# Altium PCB 全场定位.PcbDoc
Units mil, origin at the board's own origin, x right, y up, seen from the top; angles counter-clockwise.
Board outline 2750.25 x 1650.38 mil, 2 copper layers (Top Layer, Bottom Layer); 83 components, 62 nets, 319 pads, 70 vias.
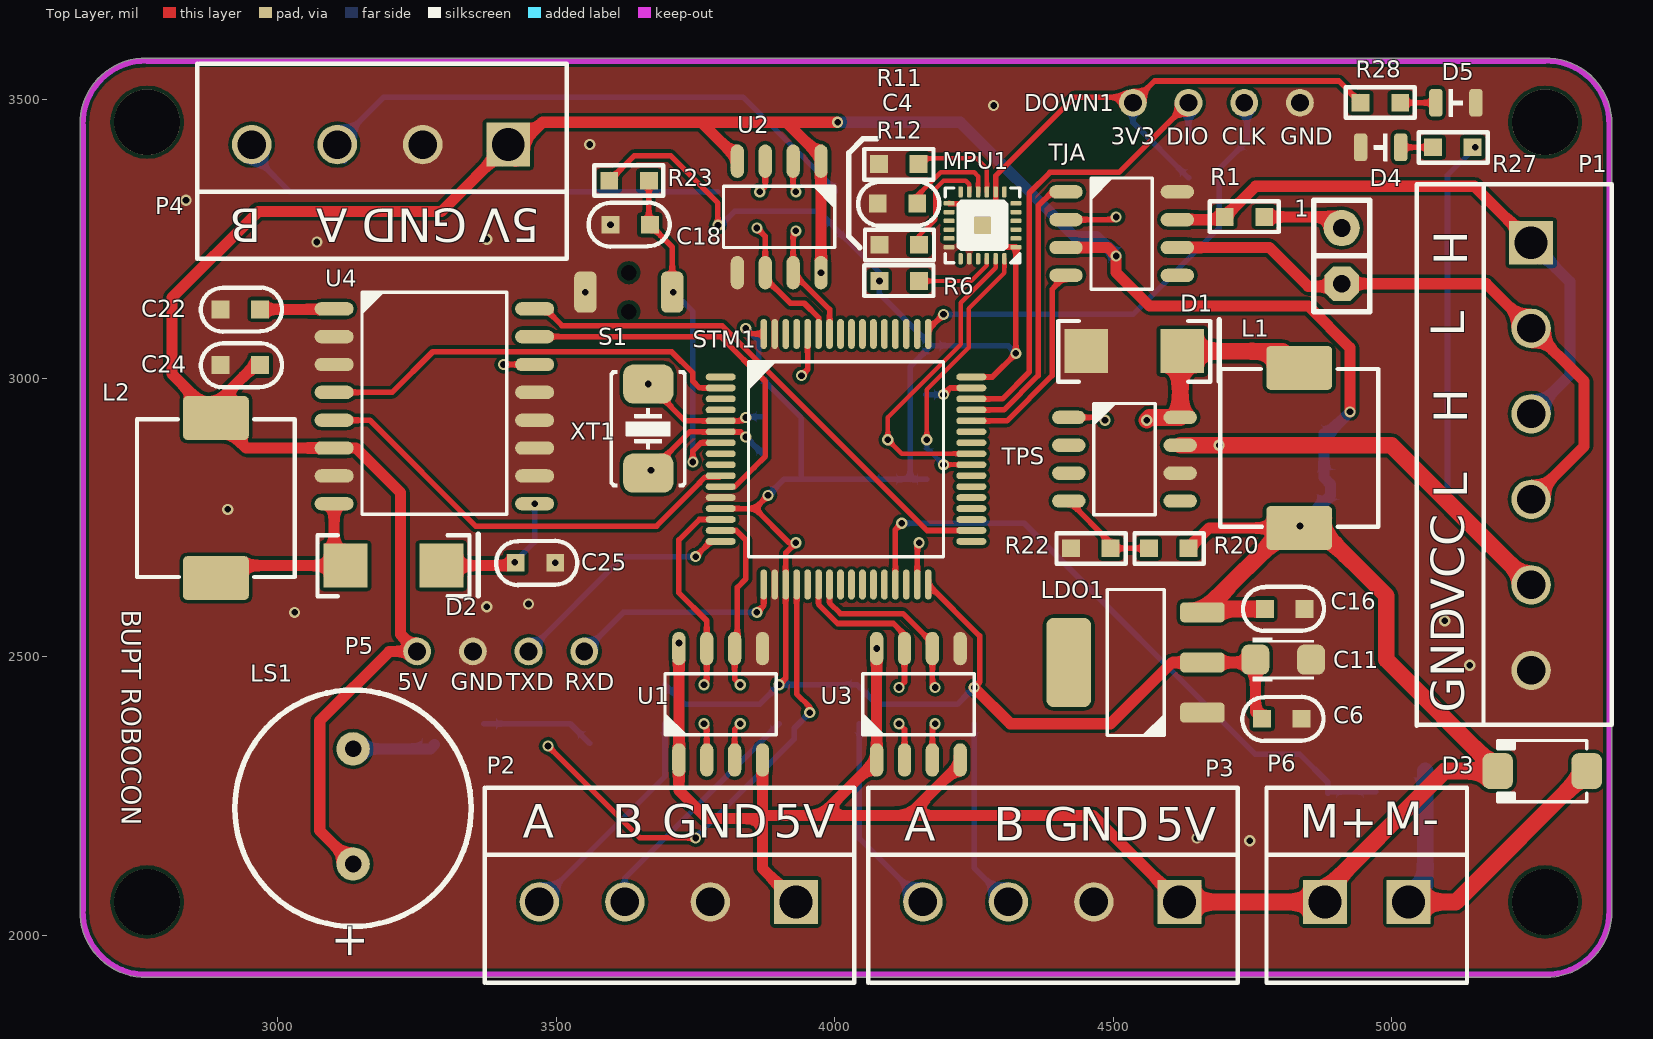
[diagram p0: Top Layer view]
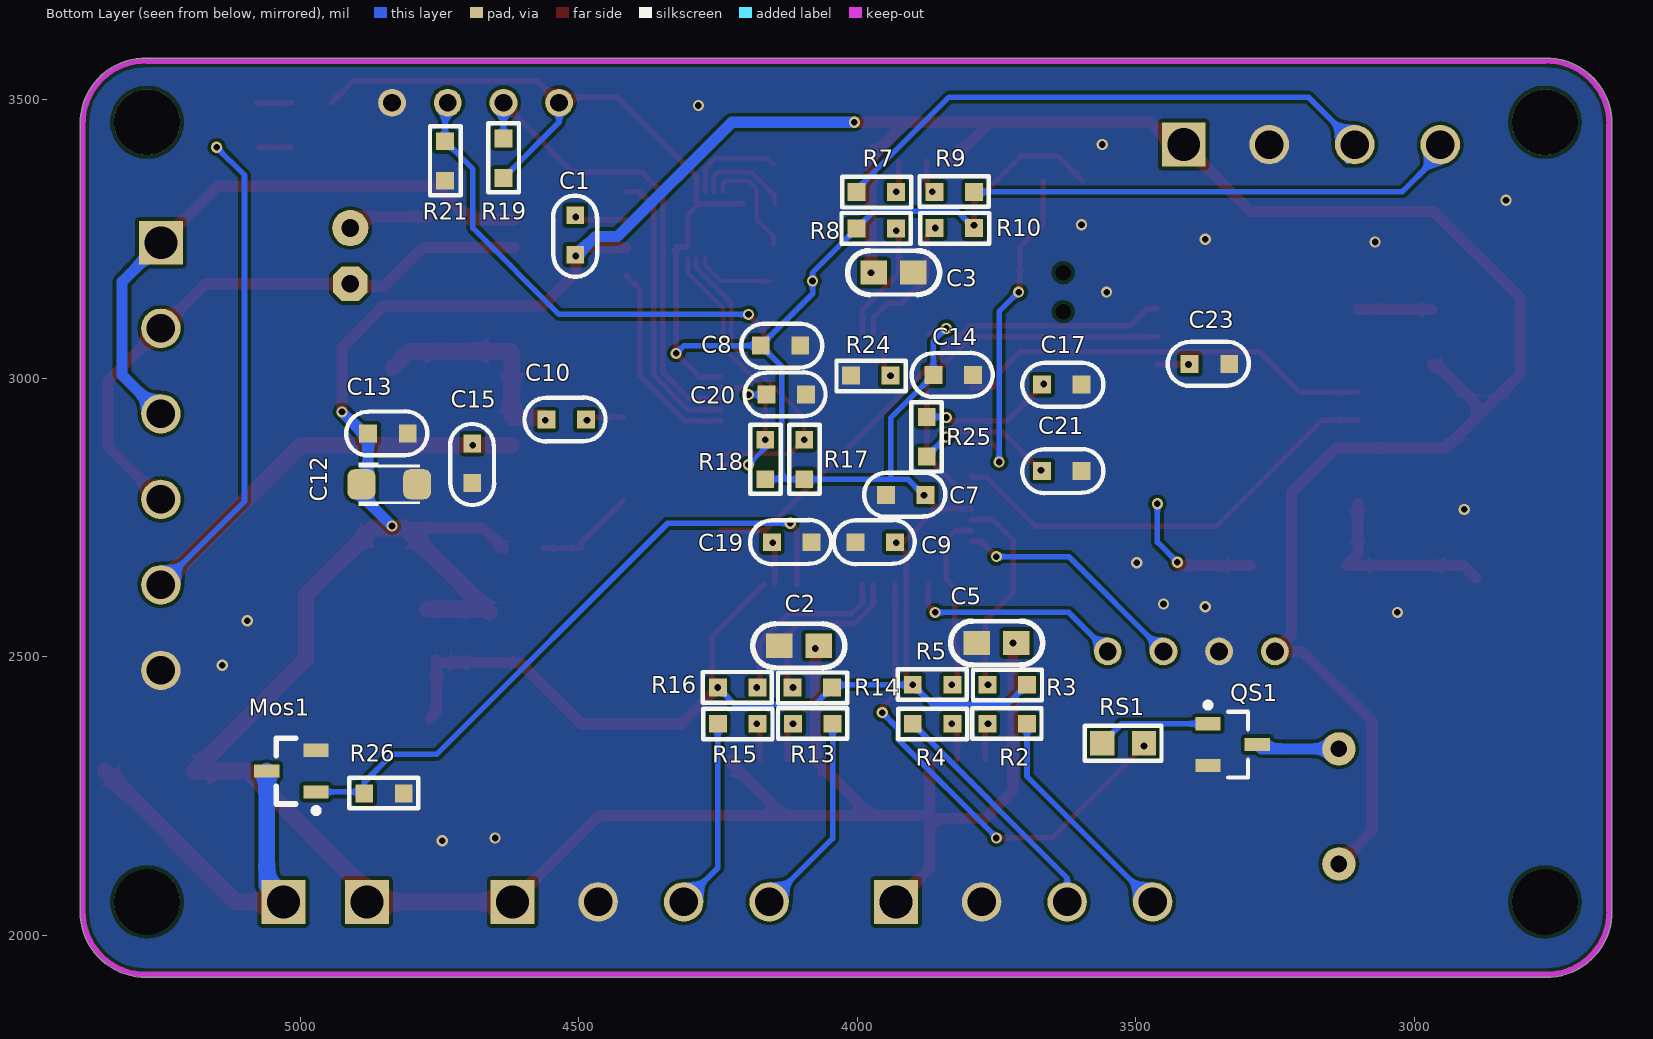
[diagram p1: Bottom Layer view, seen from below]
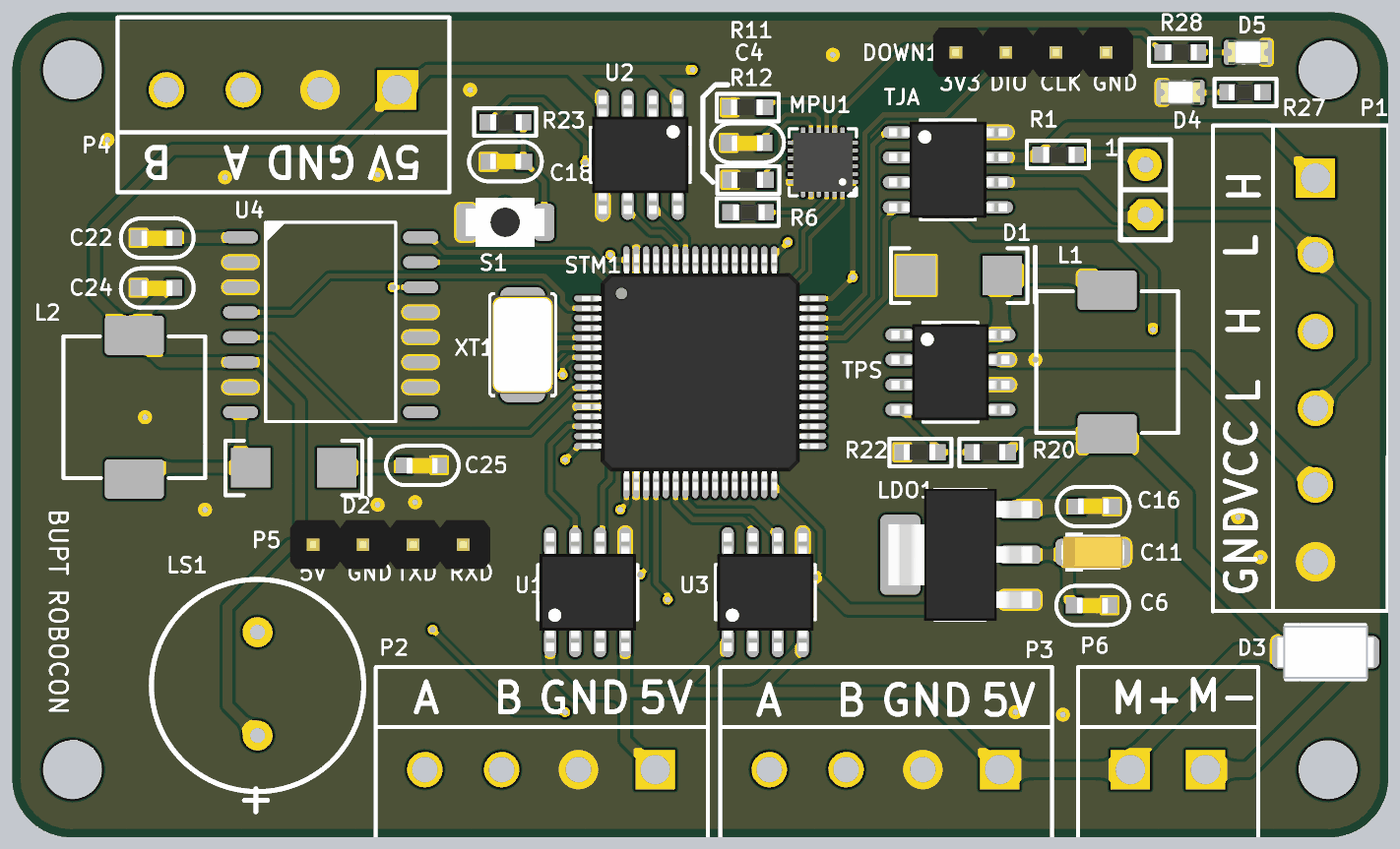
[diagram p2: 3D render of the assembled board from above, using the file's embedded part models]
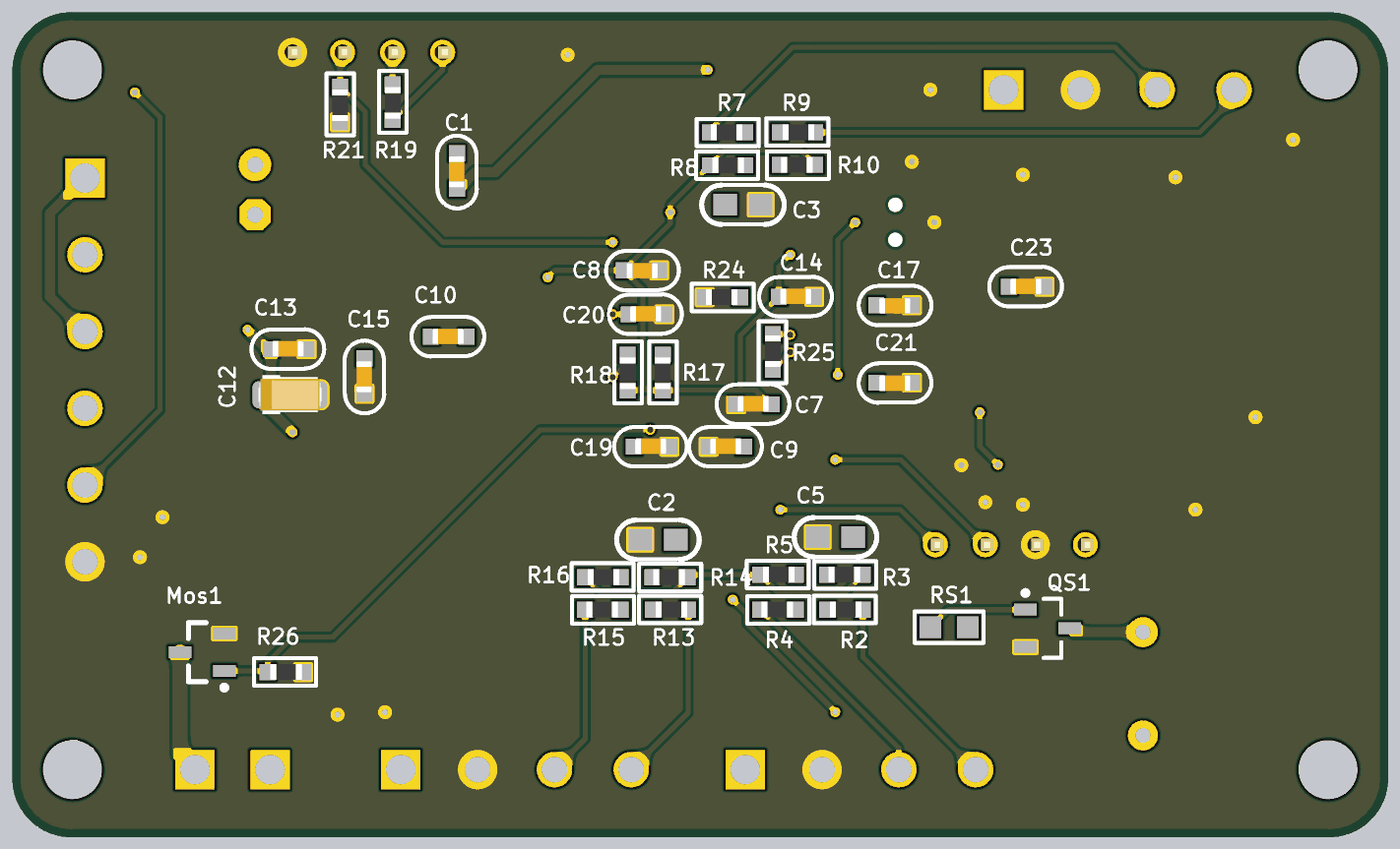
[diagram p3: 3D render of the assembled board from below, using the file's embedded part models]

## Layer stack, top to bottom
Top Solder: solder mask 0.4, Solder Resist, Dk 3.5
Top Layer: signal copper 1.4
Dielectric 1: dielectric 12.6, FR-4, Dk 4.8
Bottom Layer: signal copper 1.4
Bottom Solder: solder mask 0.4, Solder Resist, Dk 3.5

## Board outline
2644.92,2044.95 ccw(c2762.41,2042.34) 2765.15,1924.86 ccw(c2765.03,1929.87) 2766.17,1924.98 5273.41,1924.98 ccw(c5274.88,1929.78) 5274.76,1924.77 5274.85,1924.77 ccw(c5274.97,1929.78) 5275.82,1924.84 ccw(c5277.59,2042.34) 5395.11,2042.34 ccw(c5277.59,2042.34) 5395.08,2044.95 ccw(c5390.06,2044.84) 5395.02,2045.63 5395.02,3454.37 ccw(c5390.06,3455.16) 5395.08,3455.05 ccw(c5277.59,3457.66) 5395.11,3457.66 ccw(c5277.59,3457.66) 5274.85,3575.14 ccw(c5274.97,3570.13) 5273.83,3575.01 2765.63,3575.01 ccw(c2764.84,3570.06) 2764.95,3575.08 ccw(c2762.34,3457.59) 2644.86,3454.85 ccw(c2649.87,3454.97) 2644.99,3453.83 2644.99,2045.63 ccw(c2649.94,2044.84)

## Design rules (kind name [scope] priority, off if disabled: settings)
Clearance [All] p1: gap=6 ignorepadtopadclearanceinfootprint=FALSE
PolygonConnect [All] p1: connectstyle=Direct reliefconductorwidth=10 reliefentries=4 polygonreliefangle="90 Angle" airgapwidth=10
RoutingVias [All] p1: holewidth=28 width=50 viastyle="Through Hole" minholewidth=28 minwidth=50 maxholewidth=28 maxwidth=50
SolderMaskExpansion [All] p1: expansion=4
Width [All] p1: maxlimit=50 minlimit=5 preferedwidth=10 minimp=50.000000 maximp=50.000000 favimp=50.000000
30 further rules are at their usual default settings.

## Components (designator, comment, footprint, x,y, rotation, side; value= is the part's Value field where it differs from the comment)
1 "Header 2" SIP2 4910,3270 r270 top
C1 "Cap_0603" CAP_0603 4505,3255 r90 bottom value=0.1u
C2 "Cap" CAP-MLCC-0603 4069.13,2520 r180 bottom value=0.1uF
C3 "Cap" CAP-MLCC-0603 3970,3190 r0 bottom value=0.1uF
C4 "Cap_0603" CAP_0603 4115,3315 r180 top value=0.1u
C5 "Cap" CAP-MLCC-0603 3714.13,2525 r180 bottom value=0.1uF
C6 "Cap_0603" CAP_0603 4805,2390 r180 top value=0.1u
C7 "Cap_0603" CAP_0603 3915,2790 r180 bottom value=0.1u
C8 "Cap_0603" CAP_0603 4135,3060 r0 bottom value=0.1u
C9 "Cap_0603" CAP_0603 3970,2705 r180 bottom value=0.1u
C10 "Cap_0603" CAP_0603 4525,2925 r180 bottom value=0.1u
C11 "Cap_Tan_1206" CAP_TAN_A1206 4805,2495 r0 top value=?F
C12 "Cap_Tan_1206" CAP_TAN_A1206 4840,2810 r180 bottom value=?F
C13 "Cap_0603" CAP_0603 4845,2900 r180 bottom value=0.1u
C14 "Cap_0603" CAP_0603 3830,3005 r180 bottom value=0.1u
C15 "Cap_0603" CAP_0603 4690,2845 r90 bottom value=1u
C16 "Cap_0603" CAP_0603 4805,2585 r0 top value=0.1u
C17 "Cap_0603" CAP_0603 3630,2990 r0 bottom value=20pf
C18 "Cap_0603" CAP_0603 3630,3275 r0 top value=0.1u
C19 "Cap_0603" CAP_0603 4120,2705 r180 bottom value=0.1u
C20 "Cap_0603" CAP_0603 4130,2970 r180 bottom value=0.1u
C21 "Cap_0603" CAP_0603 3630,2835 r0 bottom value=20pf
C22 "Cap_0603" CAP_0603 2935,3125 r180 top value=1u
C23 "Cap_0603" CAP_0603 3370,3025 r180 bottom value=1u
C24 "Cap_0603" CAP_0603 2935,3025 r180 top value=1u
C25 "Cap_0603" CAP_0603 3465,2670 r180 top value=0.1u
D1 "Diode" SS34 4535,3045 r180 top
D2 "Diode" SS34 3205,2660 r180 top
D3 "Diode_SMA" DO-214AC 5270,2295 r180 top value=1N?
D4 "LED_0805" LED_0805_YELLOW 4980,3415 r180 top
D5 "LED_0805" LED_0805_YELLOW 5115,3495 r0 top
DOWN1 "HDR1x4_2.54" HDR1X4_2.54_180 4535,3495 r90 top
L1 "Inductor" CD74 4830,2870 r180 top value=47uH
L2 "Inductor" CD74 2885,2780 r180 top value=560uH
LDO1 "LDO1117" SOT223-3 4540,2490 r90 top
LS1 "Bell" Ring 3135,2228.31 r90 top
Mos1 "MOSFET N" Nmos_SOT23 5015.71,2295 r0 bottom
MPU1 "MPU9250" QFN_P0.4_24 4265,3275 r180 top
P1 "HDR1x6_2.54" green_6p 5345,3168.54 r270 top
P2 "HDR1x4_2.54" Green_4P 3855,1965 r180 top
P3 "HDR1x4_2.54" green_4p#1 4543.54,1965 r180 top
P4 "HDR1x4_2.54" green_4p#2 3338.54,3515 r180 top
P5 "HDR1x4_2.54" HDR1X4_2.54_180 3250,2510 r90 top
P6 "Connector" "Green 2P" 4960.78,2058.99 r180 top
QS1 "8050" SOT-23B_N 3325.71,2342.6 r180 bottom
R1 "Res_0603" RES_0603 4737,3372 r0 top value=120
R2 "Res_0603" RES_0603 3729,2462 r180 bottom value=10K
R3 "Res_0603" RES_0603 3732,2368 r0 bottom value=10K
R4 "Res_0603" RES_0603 3866,2298 r0 bottom value=10K
R5 "Res_0603" RES_0603 3863,2532 r180 bottom value=10K
R6 "Res_0603" RES_0603 4117,3257 r0 top value=10K
R7 "Res_0603" RES_0603 3967,3253 r0 bottom value=10K
R8 "Res_0603" RES_0603 3964,3351 r180 bottom value=10K
R9 "Res_0603" RES_0603 3824,3417 r180 bottom value=10K
R10 "Res_0603" RES_0603 3827,3188 r0 bottom value=10K
R11 "Res_0603" RES_0603 4113,3303 r180 top value=10K
R12 "Res_0603" RES_0603 4114,3158 r180 top value=10K
R13 "Res_0603" RES_0603 4078,2462 r180 bottom value=10K
R14 "Res_0603" RES_0603 4082,2363 r0 bottom value=10K
R15 "Res_0603" RES_0603 4216,2298 r0 bottom value=10K
R16 "Res_0603" RES_0603 4213,2527 r180 bottom value=10K
R17 "Res_0603" RES_0603 4013,2853 r270 bottom value=10K
R18 "Res_0603" RES_0603 4083,2853 r270 bottom value=10K
R19 "Res_0603" RES_0603 4553,3394 r270 bottom value=10K
R20 "Res_0603" RES_0603 4598,2613 r180 top value=10K
R21 "Res_0603" RES_0603 4658,3389 r270 bottom value=10K
R22 "Res_0603" RES_0603 4458,2613 r180 top value=3.3K
R23 "Res_0603" RES_0603 3632,3437 r0 top value=10K
R24 "Res_0603" RES_0603 3977,2923 r0 bottom value=10K
R25 "Res_0603" RES_0603 3957,2897 r90 bottom value=1M
R26 "Res_0603" RES_0603 4848,2337 r180 bottom value=10K
R27 "Res_0603" RES_0603 5108,3333 r180 top value=1K
R28 "Res_0603" RES_0603 4981,3577 r0 top value=1K
RS1 "Res1" RES-0603 3559.8,2345 r0 bottom value=1K
S1 "ButtonTACT_3x4x2_180" ButtonTACT_3x4x2_180H 3630,3155 r180 top
STM1 "STM32F4" LQFP_P0.5_64 4020,2855 r0 top
TJA "TJA1050" SOP_E150_8 4515,3260 r0 top
TPS "TPS5430" SOP_E150_8 4520,2855 r0 top (schematic designator *1)
U1 "HCPL0630" SOP_E150_8 3795,2415 r90 top
U2 "HCPL0630" SOP_E150_8 3900,3290 r270 top
U3 "HCPL0630" SOP_E150_8 4150,2415 r90 top
U4 "ADXRS810" sop16 3295,2945 r0 top
XT1 "XTAL_5032_2P" XT_5032_2 3665,2910 r90 top value=8M

## Footprints (in the part's own frame and the unit in brackets; to place one, negate y for a bottom-side part, rotate by r counter-clockwise, add the part's x,y. Pads: shape width x height; smd on the part's side, far side on the other; paste and mask are expansions set on the pad)
ButtonTACT_3x4x2_180H [mil]
  round 0 hole 28: 0(0,35) 0(0,-35)
  rrect50% 40x74 smd: 1(-78,0) 2(78,0)
  body extent -79,-49 79,49, height 63
CAP-MLCC-0603 [mm]
  rect 1.2x1.1 smd: 1(0,0) 2(-1.8,0)
  silkscreen extent -3,-1 1.2,1, body extent -1.77,-0.47 -0.02,0.48, height 0.85
CAP_0603 [mil]
  rect 32x32 smd: 1(-33,1) 2(38,1)
  silkscreen extent -72,-38 73,41, body extent -30,-14 33,18, height 31
CAP_TAN_A1206 [mil]
  rrect50% 50x54 smd: 1(-50,0) 2(50,0)
  silkscreen extent -55,-39 55,39, body extent -63,-31 63,32, height 71
CD74 [mm]
  rrect20% 3x2 smd: 1(-0.095,-3.784) 2(-0.095,3.516)
  silkscreen extent -3.69,-3.73 3.51,3.47, body extent -3.68,-3.71 3.51,3.45, height 4
DO-214AC [mil] "SMA"
  rrect50% 55x65 smd: 1(-80,0) 2(80,0)
  silkscreen extent -80,-55 80,55, body extent -98,-53 98,53, height 85
"Green 2P" [mm]
  rect 2x2 hole 1.5: 1(-1.758,-0.026) 2(2.052,-0.026)
  silkscreen extent -4.43,-5.23 4.72,3.66
Green_4P [mm]
  rect 2x2 hole 1.5: 1(-1.905,-2.413)
  round 1.8 hole 1.3: 2(1.995,-2.413) 3(5.895,-2.413) 4(9.795,-2.413)
  silkscreen extent -4.57,-7.62 12.28,1.27
green_4p#1 [mm]
  rect 2x2 hole 1.5: 1(-1.905,-2.413)
  round 1.8 hole 1.3: 2(1.995,-2.413) 3(5.895,-2.413) 4(9.795,-2.413)
  silkscreen extent -4.57,-7.62 12.28,1.27
green_4p#2 [mm]
  rect 2x2 hole 1.5: 1(-1.905,2.413)
  round 1.8 hole 1.3: 2(1.995,2.413) 3(5.895,2.413) 4(9.795,2.413)
  silkscreen extent -4.57,-1.27 12.28,7.62
green_6p [mm]
  rect 2x2 hole 1.5: 1(-1.905,-2.413)
  round 1.8 hole 1.3: 2(1.995,-2.413) 3(5.895,-2.413) 4(9.795,-2.413) 5(13.695,-2.413) 6(17.595,-2.413)
  silkscreen extent -4.57,-7.63 20.12,1.27
HDR1X4_2.54_180 [mil]
  round 50 hole 32: 1(0,0) 2(0,-100) 3(0,-200) 4(0,-300)
  body extent -49,-350 49,50, height 323
LED_0805_YELLOW [mil]
  rrect50% 24x50 smd: 1(-36,0) 2(36,0)
  silkscreen extent -12,-24 12,24, body extent -40,-25 40,25, height 43
LQFP_P0.5_64 [mil]
  oval 54x12 smd: 1(-225,147.64) 2(-225,127.95) 3(-225,108.27) 4(-225,88.58) 5(-225,68.9) 6(-225,49.21) 7(-225,29.53) 8(-225,9.84) 9(-225,-9.84) 10(-225,-29.53) 11(-225,-49.21) 12(-225,-68.9) 13(-225,-88.58) 14(-225,-108.27) 15(-225,-127.95) 16(-225,-147.64) 33(225,-147.64) 34(225,-127.95) 35(225,-108.27) 36(225,-88.58) 37(225,-68.9) 38(225,-49.21) 39(225,-29.53) 40(225,-9.84) 41(225,9.84) 42(225,29.53) 43(225,49.21) 44(225,68.9) 45(225,88.58) 46(225,108.27) 47(225,127.95) 48(225,147.64)
  oval 12x54 smd: 17(-147.64,-225) 18(-127.95,-225) 19(-108.27,-225) 20(-88.58,-225) 21(-68.9,-225) 22(-49.21,-225) 23(-29.53,-225) 24(-9.84,-225) 25(9.84,-225) 26(29.53,-225) 27(49.21,-225) 28(68.9,-225) 29(88.58,-225) 30(108.27,-225) 31(127.95,-225) 32(147.64,-225) 49(147.64,225) 50(127.95,225) 51(108.27,225) 52(88.58,225) 53(68.9,225) 54(49.21,225) 55(29.53,225) 56(9.84,225) 57(-9.84,225) 58(-29.53,225) 59(-49.21,225) 60(-68.9,225) 61(-88.58,225) 62(-108.27,225) 63(-127.95,225) 64(-147.64,225)
  silkscreen extent -175,-175 175,175, body extent -236,-236 236,236, height 59
Nmos_SOT23 [mm]
  rect 1.15x0.6 smd: D(1.125,0) G(-1.125,0.95) S(-1.125,-0.95)
  silkscreen extent -1.25,-1.5 0.7,1.92, body extent -0.7,-1.5 0.7,1.5, height 1.14
QFN_P0.4_24 [mil]
  rrect50% 20x8 smd: 1(-60,39.37) 2(-60,23.62) 3(-60,7.87) 4(-60,-7.87) 5(-60,-23.62) 6(-60,-39.37) 13(60,-39.37) 14(60,-23.62) 15(60,-7.87) 16(60,7.87) 17(60,23.62) 18(60,39.37)
  rrect50% 8x20 smd: 7(-39.37,-60) 8(-23.62,-60) 9(-7.87,-60) 10(7.87,-60) 11(23.62,-60) 12(39.37,-60) 19(39.37,60) 20(23.62,60) 21(7.87,60) 22(-7.87,60) 23(-23.62,60) 24(-39.37,60)
  rrect20% 45x45 smd: 25(0,0)
  silkscreen extent -67,-67 67,67, body extent -60,-60 60,60, height 39
RES-0603 [mm]
  rect 1.1x1.1 smd: 1(0,0) 2(-1.9,0)
  silkscreen extent -2.7,-0.8 0.8,0.8, body extent -1.8,-0.47 -0.1,0.48, height 0.6
RES_0603 [mil]
  rect 32x32 smd: 1(-37,-82) 2(34,-82)
  silkscreen extent -64,-109 60,-54, body extent -31,-98 31,-66, height 18
Ring [mil]
  round 60 hole 30: 1(-100,0) 2(106.69,0)
  silkscreen extent -212,-212 212,212
SIP2 [mil]
  round 65 hole 32: 1(0,0)
  oct 62x62 hole 32: 2(100,0)
  silkscreen extent -50,-50 150,50
sop16 [mil]
  oval 70x24 smd: 1(-194,180) 2(-194,130) 3(-194,80) 4(-194,30) 5(-194,-20) 6(-194,-70) 7(-194,-120) 8(-194,-170) 9(166,-170) 10(166,-120) 11(166,-70) 12(166,-20) 13(166,30) 14(166,80) 15(166,130) 16(166,180)
  silkscreen extent -144,-189 116,210
SOP_E150_8 [mil]
  oval 60x24 smd: 1(-100,75) 2(-100,25) 3(-100,-25) 4(-100,-75) 5(100,-75) 6(100,-25) 7(100,25) 8(100,75)
  silkscreen extent -55,-100 55,100, body extent -118,-96 118,96, height 69
SOT223-3 [mil]
  rrect40% 36x80 smd: 1(-90.16,-120) 2(0,-120) 3(90.16,-120)
  rrect30% 160x80 smd: 4(0,120)
  silkscreen extent -131,-51 131,51, body extent -132,-144 132,144, height 71
SOT-23B_N [mm] "SOT23, 3-Leads, Body 2.9x1.3mm, Pitch 0.95mm, Lead Span 2.4mm, IPC Medium Density"
  rect 1.15x0.6 smd: 1(-1.125,0.95) 2(-1.125,-0.95) 3(1.125,0)
  silkscreen extent -1.25,-1.5 0.7,1.92, body extent -0.7,-1.5 0.7,1.5, height 1.14
SS34 [mm]
  rect 2x2 smd: A(2.125,-0.102) K(-2.25,-0.102)
  silkscreen extent -3.94,-1.52 3.4,1.3, body extent -2.48,-1.48 2.37,1.3, height 1.4
XT_5032_2 [mil]
  rrect50% 70x90 smd: 1(-80,0) 2(80,0)
  silkscreen extent -104,-68 104,68, body extent -98,-63 98,63, height 39

## Part data
1: "Header, 2-Pin", LatestRevisionDate=17-Jul-2002, LatestRevisionNote="Re-released for DXP Platform.", Publisher="Altium Limited"
C1 C2 C3 C4 C5 C6 C7 C8 C9 C10 C11 C12 C13 C14 C15 C16 C17 C18 C19 C20 C21 C22 C23 C24 C25: "Capacitor"
  C2 C3 C5: LatestRevisionDate=17-Jul-2002, LatestRevisionNote="Re-released for DXP Platform.", PackageReference=RAD-0.3, Published=8-Jun-2000, Publisher="Altium Limited"
D3: "Diode"
D4 D5: "LED"
DOWN1 P1 P2 P3 P4 P5: "Header"
LDO1: "Power"
LS1: "Electrical Bell", LatestRevisionDate=17-Jul-2002, LatestRevisionNote="Re-released for DXP Platform.", PackageReference=PIN2, Published=24-Mar-1999, Publisher="Altium Limited"
Mos1: "MOS SOT23"
P6: library part 2P
QS1: library part QNPN, "NPN Bipolar Transistor", LatestRevisionDate=29-May-2009, LatestRevisionNote="IPC-7351 Footprint Added.", PackageDescription="3-Pin SOT-23 Package 0.95 mm Pitch, 2.4 mm Lead Span", PackageReference=SOT-23B, PackageVersion=Aug-1999, Published=8-Jun-2000, Publisher="Altium Limited"
R1 R2 R3 R4 R5 R6 R7 R8 R9 R10 R11 R12 R13 R14 R15 R16 R17 R18 R19 R20 R21 R22 R23 R24 R25 R26 R27 R28 RS1: "Resistor"
  RS1: LatestRevisionDate=17-Jul-2002, LatestRevisionNote="Re-released for DXP Platform.", PackageReference=AXIAL-0.3, Published=8-Jun-2000, Publisher="Altium Limited"
S1: "Button"
STM1: library part STM32F405R, "MCU"
XT1: "Crystal Oscillator"
L1 L2: Code_IEC=1005, Code_JEITA=0402, LatestRevisionDate=17-Jul-2002, LatestRevisionNote="Re-released for DXP Platform.", PackageReference=0402-A, Published=8-Jun-2000, Publisher="Altium Limited"

## Free pads (board coordinates)
  round 118.11 hole 118.11 unplated: 2(2765,2060) 2(2765,3460) 2(5275,2060) 2(5275,3460)

## Via types
v1: diameter 20, hole 12, Top Layer to Bottom Layer, 70 vias

## Nets (pads, with @x,y where several pads share a name; then routed paths per layer and width w, separated by ;. In a path a pad name is that pad's centre, name@x,y a point inside that pad or via, vN(x,y) a via of type N, cw(c..) or ccw(c..) an arc to the next point about the centre after c; other vN are vias at no path point)
3V3: C6.2 C7.2 C8.2 C9.2 C11.1 C14.1 DOWN1.1 LDO1.2 MPU1.1 MPU1.8 MPU1.13 R3.1 R5.1 R6.1 R8.1 R10.1 R14.1 R16.1 R17.2 R18.2 R19.2 R23.1 R28.1 STM1.13 STM1.19 STM1.32 STM1.48 STM1.64 | length 5306.2
  Top Layer w10: R23.1 3640,3400 3705,3400 3790,3315 v1(3790,3275) ; STM1.13 3856.42,2766.42 ; v1(3840,3090) 3850,3080 STM1.64 ; v1(3880,2790) 3856.42,2766.42 ; v1(3900,2450) 3911.73,2461.73 STM1.19 3911.73,2686.73 v1(3930,2705) 3917.83,2705 3856.42,2766.42 ; STM1.32 4260,2537.64 4260,2455 v1(4250,2445) ; MPU1.13 4205,3314 4284,3314 ; STM1.48 4282.64,3002.64 v1(4325,3045) MPU1.1 4324.63,3236 4309,3236 4305,3240 4305,3241.99 4304,3242.99 4304,3294 4284,3314 ; DOWN1.1 4574,3534 4905,3534 R28.1 ; DOWN1.1@4535,3505 4430,3505 4288.62,3363.62 MPU1.8 4288.62,3318.62 4284,3314
  Top Layer w20: v1(4250,2445) 4315,2380 4495,2380 4605,2490 LDO1.2 4750,2490 C11.1 4755,2401 C6.2
  Bottom Layer w10: R3.1 3730,2415 3865,2415 v1(3900,2450) 4040,2450 R14.1 4075,2415 4220,2415 v1(4250,2445) ; R10.1 3820,3300 3970,3300 R8.1 4080,3190 v1(4080,3175) 4080,3152 C8.2 ; v1(3840,3090) 3863,3067 C14.1 3940,2929 3940,2825 ; v1(3880,2790) 3909,2819 R17.2 4135,2819 ; R18.2 4135,2819 ; v1(4325,3045) 4311,3059 C8.2 ; DOWN1.1@4535,3505 DOWN1.1 4535,3460 R19.2 ; 4135,2819 4135,3021 C8.2
5V: C1.1 C2.1 C3.1 C5.1 C12.1 C13.1 C16.1 C24.1 D3.2 L1.2 L2.1 LDO1.3 LS1.1 P2.1 P3.1 P4.1 P5.1 P6.2 R20.1 TJA.3 U1.1 U1.4 U1.8 U2.1 U2.4 U2.8 U3.1 U3.4 U3.8 U4.6 | length 8669.1
  Top Layer w20: C24.1 2959,3024 2888.73,2953.73 L2.1 ; LS1.1 3075,2188.31 3075,2385 3200,2510 P5.1 3220,2540 3220,2795 3140,2875 U4.6 2942.7,2875 L2.1 ; P4.1 3293.54,3300 2965,3300 2810,3145 2810,3007.7 L2.1 ; P4.1@3427.09,3390 3427.09,3412.09 3475,3460 v1(4005,3460) ; U1.8 U1.1 3720,2260 3770,2210 3870,2210 ; 3765,3455 3825,3395 U2.4 ; U1.4 3870,2215 ; 3917.6,3455 3975,3397.6 U2.1 v1(3975,3190) ; P2.1 3870,2120 3870,2210 ; v1(4075,2515) U3.1 3975,2215 ; U3.4 4225,2307.4 4132.6,2215 ; TJA.3 4490,3235 v1(4505,3220) 4505,3190 4565,3130 4850,3130 4925,3055 v1(4925,2940) ; P3.1 4463.54,2215 4132.6,2215 ; R20.1 4671.57,2731.57 L1.2@4811.41,2731.57 ; 3870,2210 3870,2215 ; 3870,2215 3975,2215 ; 3975,2215 4132.6,2215
  Top Layer w30: P3.1 4860,2060 5095,2295 D3.2 4990,2495 4990,2610 4868.43,2731.57 L1.2 4811.41,2731.57 LDO1.3@4665.84,2586 ; LDO1.3 LDO1.3@4665.84,2586 ; C16.1 LDO1.3@4665.84,2586
  Bottom Layer w20: v1(4005,3460) 4225,3460 4430,3255 4470,3255 v1(4505,3220) ; v1(4835,2735) 4890,2790 C12.1 4878,2822 C13.1 4886,2901 v1(4925,2940)
  other v1: 3720,2525
CAN_H: P1.1 P1.3 R1.1 TJA.7 | length 1067
  Top Layer w20: TJA.7 4695,3285 R1.1 4755,3345 5148.54,3345 P1.1
  Bottom Layer w20: P1.3 5320,3006.46 5320,3173.54 P1.1
CAN_L: 1.2 P1.2 P1.4 TJA.6 | length 1085
  Top Layer w20: TJA.6 4780,3235 4850,3165 4905,3165 1.2 5170,3170 P1.2 5345,2995 5345,2877.91 P1.4
CAN_RX: STM1.44 TJA.4 | length 368.9
  Top Layer w10: STM1.44 4308.9,2923.9 4390,3005 4390,3160 TJA.4
CAN_TX: STM1.45 TJA.1 | length 510.8
  Top Layer w10: STM1.45 4303.58,2943.58 4365,3005 4365,3310 4390,3335 TJA.1
CSN: STM1.2 U4.4 | length 760
  Top Layer w10: U4.4 3205,2975 3278,3048 3707,3048 3745,3010 3745,2995 3757.05,2982.95 STM1.2
GND: C2.2 C3.2 C4.2 C5.2 C6.1 C7.1 C8.1 C9.1 C11.2 C12.2 C13.2 C14.2 C15.1 C16.2 C17.1 C18.1 C19.2 C20.2 C21.1 C22.2 C23.2 C24.2 C25.1 D1.A D4.2 D5.2 DOWN1.4 LDO1.1 Mos1.S MPU1.18 MPU1.20 P1.6 P2.2 P3.2 P4.2 P5.2 QS1.2 R11.2 R12.2 R21.2 R22.2 R24.2 R26.2 S1.2 STM1.12 STM1.18 STM1.63 TJA.8 TPS.6 U1.5 U2.5 U3.5 U4.2 U4.3 U4.7 U4.10 U4.11 U4.12 U4.13
  other v1: 4745,2170 4650,2175 5140,2485 5095,2565 3030,2580 3375,2590 3450,2595 3498,2669 2910,2765 3552,3155 3070,3245 3375,3250 3597,3276 2835,3320 3560,3420 4285,3490
MISO: STM1.10 U4.5 | length 810.7
  Top Layer w10: U4.5 3165,2925 3355,2735 3680,2735 3757,2812 3757,2812.83 3766.96,2822.79 3792.31,2822.79 STM1.10
MOSI: STM1.11 U4.15 | length 684.6
  Top Layer w10: U4.15 3795,3075 3875,2995 3875,2860 3855,2840 3854.57,2840 3820.36,2805.79 STM1.11
Net1_1: 1.1 R1.2 | length 147.3
  Top Layer w20: R1.2 4890,3290 1.1
Net*1_1: C10.2 TPS.1 | length 67.1
  Top Layer w10: TPS.1 4480,2930 v1(4485,2925)
Net*1_4: R20.2 R22.1 TPS.4 | length 185.1
  Top Layer w10: TPS.4 4495,2705 R22.1 R20.2
Net*1_8: C10.1 D1.K L1.1 TPS.8 | length 405.1
  Top Layer w30: v1(4560,2925) 4565,2930 TPS.8 4620,3045.4 D1.K 4803.7,3049 L1.1
NetC1_2: C1.2 TJA.2 | length 92.1
  Top Layer w10: TJA.2 4500,3285 v1(4505,3290)
NetC4_1: C4.1 MPU1.10 | length 171.3
  Top Layer w8: C4.1 4148,3328 4190,3370 4250,3370 4257.13,3362.87 MPU1.10
NetC19_1: C19.1 STM1.31 | length 77.1
  Top Layer w10: STM1.31 4147.95,2702.95 4150,2705 v1(4151.25,2705)
NetC20_1: C20.1 STM1.47 | length 87
  Top Layer w10: v1(4195,2971) 4206.95,2982.95 STM1.47
  Bottom Layer w10: C20.1 v1(4195,2971)
NetC22_1: C22.1 U4.1 | length 133.4
  Top Layer w20: C22.1 3100,3124 U4.1
NetC23_1: C23.1 U4.14 | length 56
  Top Layer w10: v1(3405,3025) U4.14
NetC25_2: C25.2 D2.K U4.9 | length 255.4
  Top Layer w20: D2.K 3422,2664 C25.2
  Bottom Layer w10: v1(3425,2670) 3461,2706 v1(3461,2775)
NetD2_A: D2.A L2.2 U4.8 | length 361.3
  Top Layer w20: L2.2 2911.17,2664 D2.A 3101,2684.35 U4.8
NetD3_1: D3.1 Mos1.D P6.1 | length 664.8
  Top Layer w30: P6.1 5115,2060 D3.1
  Bottom Layer w30: P6.1 5060,2090 Mos1.D
NetD4_1: D4.1 R27.2 | length 58
  Top Layer w10: D4.1 R27.2
NetD5_1: D5.1 R28.2 | length 64
  Top Layer w10: R28.2 D5.1
NetLS1_2: LS1.2 QS1.3 | length 149.6
  Bottom Layer w20: LS1.2 3273.82,2335 QS1.3
NetMPU1_9: MPU1.9 R11.1 | length 176.5
  Top Layer w8: R11.1 4160,3395 4255,3395 4272.87,3377.13 MPU1.9
NetMPU1_11: MPU1.11 R12.1 | length 195.9
  Top Layer w8: R12.1 4151,3256 4180,3285 4180,3340 4195,3355 4235,3355 4241.38,3348.62 MPU1.11
NetMPU1_22: MPU1.22 R6.2 | length 141.5
  Top Layer w8: R6.2@4155,3175 4245,3175 4272.87,3202.87 MPU1.22
NetQS1_1: QS1.1 RS1.1 | length 204.3
  Bottom Layer w10: QS1.1 3524.8,2380 RS1.1
NetR2_1: R2.1 U1.2 | length 67.1
  Top Layer w10: v1(3765,2380) 3770,2375 U1.2
NetR4_1: R4.1 U1.3 | length 69.1
  Top Layer w10: U1.3 3820,2370 v1(3830,2380)
NetR7_1: R7.1 U2.2 | length 57.1
  Top Layer w10: U2.2 3925,3340 v1(3930,3335)
NetR9_1: R9.1 U2.3 | length 59.1
  Top Layer w10: v1(3865,3335) 3875,3345 U2.3
NetR13_1: R13.1 U3.2 | length 69.1
  Top Layer w10: v1(4115,2380) 4125,2370 U3.2
NetR15_1: R15.1 U3.3 | length 67.1
  Top Layer w10: U3.3 4175,2375 v1(4180,2380)
NetR24_1: R24.1 STM1.60 | length 79.6
  Top Layer w10: v1(3940,3005) 3951.1,3016.1 STM1.60
NRST: C18.2 R23.2 S1.1 STM1.7 | length 612.9
  Top Layer w10: R23.2 3666,3278 C18.2 3708,3236 S1.1 ; v1(3745,2850) 3745,2870 3759.53,2884.53 STM1.7
  Bottom Layer w10: v1(3710,3155) 3745,3120 v1(3745,2850)
OSC1: C17.2 R25.2 STM1.5 XT1.2 | length 240.3
  Top Layer w10: v1(3665,2990) 3731.1,2923.9 STM1.5 3833.9,2923.9 v1(3840,2930)
  Bottom Layer w10: v1(3840,2930) 3841,2931 R25.2
OSC2: C21.2 R25.1 STM1.6 XT1.1 | length 259.1
  Top Layer w10: XT1.1 v1(3670,2835) 3739.21,2904.21 STM1.6 3830.79,2904.21 v1(3840,2895)
  Bottom Layer w10: v1(3840,2895) R25.1
RING: RS1.2 STM1.20 | length 882.7
  Top Layer w10: v1(3485,2340) 3650,2175 v1(3750,2175) ; STM1.20 3931.42,2433.58 3955,2410 v1(3955,2400)
  Bottom Layer w10: v1@3749.5,2175.5 3927,2353 3927,2372 v1(3955,2400)
RXD: P5.4 STM1.17 | length 394.1
  Top Layer w10: v1(3860,2580) 3872.36,2592.36 STM1.17
  Bottom Layer w10: P5.4 3620,2580 v1(3860,2580)
SCL: MPU1.23 R17.1 STM1.41 | length 565.8
  Top Layer w8: STM1.41 4203.44,2864.84 4203.28,2865 4186.72,2865 4186.56,2864.84 4120.16,2864.84 v1(4095,2890) 4095,2930 4226,3061 4226,3136 4288.62,3198.62 MPU1.23
SCLK: STM1.34 U4.16 | length 948.8
  Top Layer w10: U4.16 3480,3125 3510,3095 3797.63,3095 4165.58,2727.05 STM1.34
SDA: MPU1.24 R18.1 STM1.40 | length 490.2
  Top Layer w8: v1(4165,2890) 4165,2980 4240,3055 4240,3125 4304.37,3189.37 MPU1.24 ; v1(4195,2845) 4195.16,2845.16 STM1.40
  Bottom Layer w8: v1(4165,2890) 4165,2875 v1(4195,2845)
SPEED1_A: P2.4 R2.2 | length 413.5
  Bottom Layer w10: P2.4 3695,2285.63 R2.2
SPEED1_B: P2.3 R4.2 | length 434.8
  Bottom Layer w10: P2.3 3622.91,2102.91 R4.2
SPEED2_A: P3.4 R13.2 | length 367.2
  Bottom Layer w10: R13.2 4044,2173.91 P3.4
SPEED2_B: P3.3 R15.2 | length 345.5
  Bottom Layer w10: R15.2 4250,2121.46 P3.3
SPEED3_A: P4.3 R7.2 | length 1027.8
  Bottom Layer w10: P4.3@3120,3390 3120,3435 3190,3505 3835,3505 4001,3339 R7.2
SPEED3_B: P4.4 R9.2 | length 846.3
  Bottom Layer w10: P4.4@2966.46,3390 3021.46,3335 R9.2
SWCLK: DOWN1.3 R21.1 STM1.49 | length 863.3
  Top Layer w10: STM1.49 4167.64,3087.64 v1(4195,3115)
  Bottom Layer w10: v1(4195,3115) 4535,3115 4690,3270 4690,3376 R21.1 4740,3500 DOWN1.3@4735,3505
SWDIO: DOWN1.2 R19.1 STM1.46 | length 882.5
  Top Layer w10: STM1.46 4300.64,2963.27 4349,3011.63 4349,3333 4386,3370 4510,3370 DOWN1.2 DOWN1.2@4635,3505
  Bottom Layer w10: R19.1 DOWN1.2 DOWN1.2@4635,3505
TIM2_CH1: R3.2 STM1.14 U1.7 | length 373
  Top Layer w10: v1(3765,2450) 3770,2455 U1.7 3770,2565 3720,2615 3720,2710 3756.73,2746.73 STM1.14
TIM2_CH2: R5.2 STM1.15 U1.6 | length 324.5
  Top Layer w10: STM1.15 3822.95,2727.05 3840,2710 3840,2640 3825,2625 3825,2520 U1.6 3820,2460 v1(3830,2450)
TIM2_CH3: Mos1.G R26.1 STM1.29 | length 1179.8
  Top Layer w10: STM1.29 4108.58,2728.58 v1(4120,2740)
  Bottom Layer w10: v1(4120,2740) 4340,2740 4755,2325 4835,2325 4885,2275 R26.1 4887.6,2257.6 Mos1.G
TIM3_CH1: R14.2 STM1.22 U3.7 | length 311.6
  Top Layer w10: STM1.22 3970.79,2594.21 4005,2560 4105,2560 4125,2540 U3.7 4125,2455 v1(4115,2445)
TIM3_CH2: R16.2 STM1.23 U3.6 | length 329.3
  Top Layer w10: STM1.23 3990.47,2597.16 4010,2577.63 4122.37,2577.63 4175,2525 U3.6 4175,2450 v1(4180,2445)
TIM4_CH1: R8.2 STM1.58 U2.7 | length 214.2
  Top Layer w10: v1(3930,3265) 3925,3260 U2.7 3925,3189.47 3990.47,3124 STM1.58
TIM4_CH2: R10.2 STM1.59 U2.6 | length 250.5
  Top Layer w10: v1(3860,3270) 3875,3255 U2.6 3875,3180 3920,3135 3945,3135 3970.79,3109.21 STM1.59
TXD: P5.3 STM1.16 | length 426.8
  Top Layer w10: v1(3750,2680) 3777.36,2707.36 STM1.16
  Bottom Layer w10: P5.3 3620,2680 v1(3750,2680)
VIN: C15.2 P1.5 R27.1 TPS.7 | length 1602.3
  Top Layer w30: TPS.7 v1(4690,2880) 4999.37,2880 P1.5
  Bottom Layer w10: v1(5150,3415) 5100,3365 5100,2779.37 P1.5
pads on no net: LDO1.4 MPU1.2 MPU1.3 MPU1.4 MPU1.5 MPU1.6 MPU1.7 MPU1.12 MPU1.14 MPU1.15 MPU1.16 MPU1.17 MPU1.19 MPU1.21 MPU1.25 S1.0 STM1.1 STM1.3 STM1.4 STM1.8 STM1.9 STM1.21 STM1.24 STM1.25 STM1.26 STM1.27 STM1.28 STM1.30 STM1.33 STM1.35 STM1.36 STM1.37 STM1.38 STM1.39 STM1.42 STM1.43 STM1.50 STM1.51 STM1.52 STM1.53 STM1.54 STM1.55 STM1.56 STM1.57 STM1.61 STM1.62 TJA.5 TPS.2 TPS.3 TPS.5

## Polygon pours and split planes (outlines as drawn)
GND on Top Layer "Top Layer-No Net" (solid, remove dead copper, pour order 0): 2520,3835 2570,3785 5625,3785 5625,1775 5595,1745 5510,1830 2450,1830
GND on Bottom Layer "Top Layer-No Net" (solid, remove dead copper, pour order 2): 2510,3675 5510,3675 5550,3635 5550,1655 2670,1655 2520,1805

## Keep-outs
Keep-Out Layer:
  lines w10: 2649.87,3454.97 cw(c2762.34,3457.59) 2764.84,3570.06 ; 2649.94,2044.84 ccw(c2762.41,2042.34) 2765.03,1929.87 ; 2650,2044.84 2650,3455 ; 2765,3570 5274.97,3570 ; 2765.03,1930 5274.88,1930 ; 5274.88,1929.78 5274.97,1929.78 ; 5274.97,1929.87 ccw(c5277.59,2042.34) 5390.06,2044.84 ; 5274.97,3570.13 cw(c5277.59,3457.66) 5390.06,3455.16 ; 5390,2042.34 5390,3455.16

## Silkscreen, mask and mechanical layers (free items; w line width, h text height)
Top Overlay:
  lines w10: 4045,3235 4025,3255 4025,3405 4050,3430 4075,3430
  text "3V3" at 4495,3420 h30
  text "DIO" at 4595,3420 h30
  text "CLK" at 4695,3420 h30
  text "GND" at 4800,3420 h30
  text "B" at 2970,3305 h60 r180
  text "A" at 3125,3305 h60 r180
  text "GND" at 3340,3305 h60 r180
  text "5V" at 3470,3305 h60 r180
  text "H" at 5075,3265 h60 r270
  text "L" at 5130,3075 h60 r90
  text "H" at 5135,2920 h60 r90
  text "L" at 5135,2785 h60 r90
  text "BUPT ROBOCON" at 2720,2585 h35 r270
  text "VCC" at 5130,2585 h60 r90
  text "5V" at 3215,2440 h30
  text "GND" at 3310,2440 h30
  text "TXD" at 3410,2440 h30
  text "RXD" at 3515,2440 h30
  text "GND" at 5130,2400 h60 r90
  text "M-" at 4985,2180 h60
  text "A" at 3440,2175 h60
  text "B" at 3600,2175 h60
  text "GND" at 3690,2175 h60
  text "5V" at 3890,2175 h60
  text "M+" at 4835,2175 h60
  text "A" at 4125,2170 h60
  text "B" at 4285,2170 h60
  text "GND" at 4375,2170 h60
  text "5V" at 4575,2170 h60

## Text inside footprints (layer, text, board x,y; h text height)
LS1: Top Overlay "+" at 3155,1955 h60 r90